# EAGLE board Pure SH (EAGLE 8.7.0)
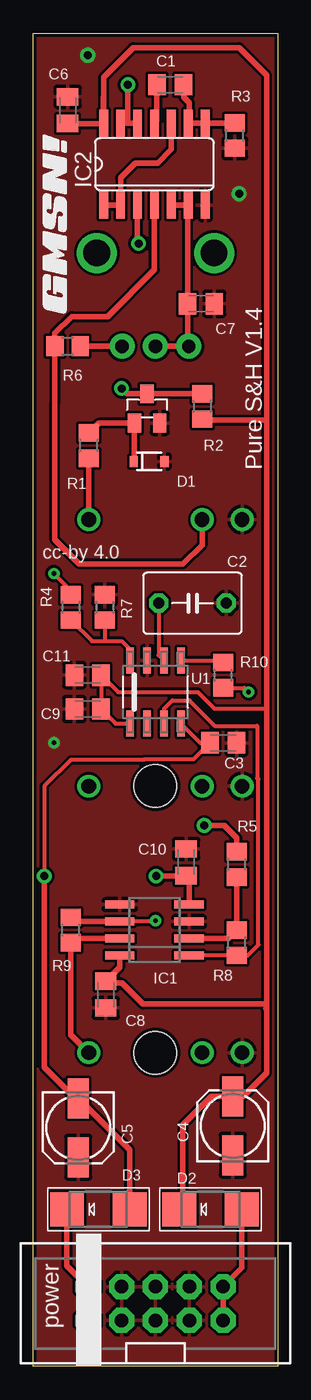
[diagram p0: board, top side]
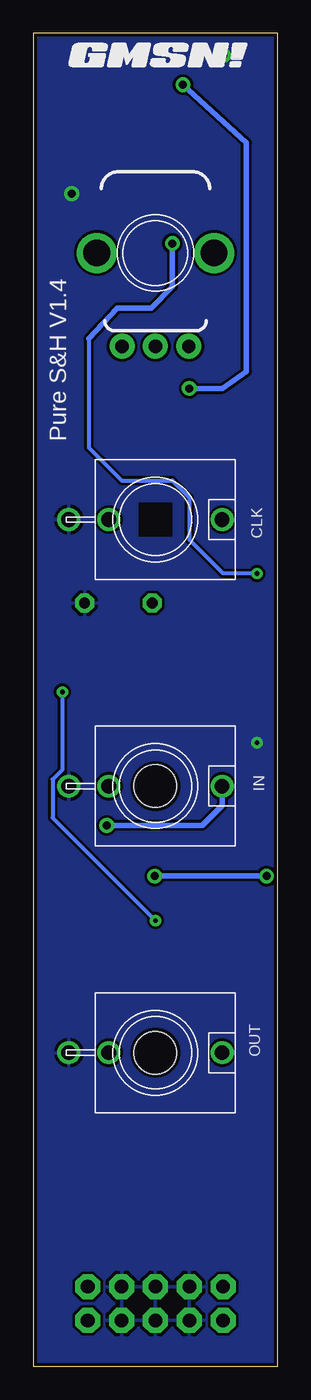
[diagram p1: board, bottom side, seen from below]

Size 18.32 x 100 mm. Coordinates in mm from the lower left corner, seen from the top.
Outline: 18.32,0 0,0 0,100 18.32,100 18.32,0
Copper layers (1*16): Top 0.035mm / dielectric 1.5mm / Bottom 0.035mm
Design rules "SparkFun": minimum track width 8mil, minimum drill 20mil, track to track 8mil, track to pad 8mil, pad to pad 8mil, via to via 8mil, smd to smd 8mil, copper to edge 10mil, drill to drill 8mil, minimum pad ring 12mil, minimum via ring 10mil, stop-mask expansion 4mil, vias tented up to drill 25mil, thermal gap 10mil
Holes 3.2 mm at 9.16,43.52 9.16,23.52

## Footprints (pad centres in the part's own frame; a part is rotated, then mirrored left to right if it is on the bottom)
C0805K = smd 1.3 x 1.6: 1 -1,0; 2 1,0
C050-045X075 = drill 0.813 octagon: 1 -2.54,0; 2 2.54,0
153CLV-0505 = smd 3 x 1.6: + 2.2,0; - -2.2,0
S_JACK = drill 1.1: GND 0,-6.5; NORM 0,-3.5; TIP 0,5
SOD-323 = smd 0.63 x 0.83: 1 -1.15,0; 2 1.15,0
SMADIODE = smd 2.54 x 2.54: A 2.349,0; C -2.349,0
SO08 = smd 0.6 x 2.2: 1 -1.905,-2.6; 2 -0.635,-2.6; 3 0.635,-2.6; 4 1.905,-2.6; 5 1.905,2.6; 6 0.635,2.6; 7 -0.635,2.6; 8 -1.905,2.6
SO14 = smd 0.66 x 2.032: 1 -3.81,-3.073; 2 -2.54,-3.073; 3 -1.27,-3.073; 4 0,-3.073; 5 1.27,-3.073; 6 2.54,-3.073; 7 3.81,-3.073; 8 3.81,3.073; 9 2.54,3.073; 10 1.27,3.073; 11 0,3.073; 12 -1.27,3.073; 13 -2.54,3.073; 14 -3.81,3.073
2X5-SHROUDED = drill 1.016 pad 1.88 octagon: 1 -1.27,5.08; 2 1.27,5.08; 3 -1.27,2.54; 4 1.27,2.54; 5 -1.27,0; 6 1.27,0; 7 -1.27,-2.54; 8 1.27,-2.54; 9 -1.27,-5.08; 10 1.27,-5.08
R0805 = smd 1.3 x 1.5: 1 -0.95,0; 2 0.95,0
Q-POT = drill 1 pad 1.88: P$1 -2.5,-7; P$2 0,-7; P$3 2.5,-7 | drill 2 pad 2.68: P$4 -4.4,0; P$5 4.4,0
TRANSISTOR_SINGLE_N-TYPE = smd 1 x 1.4: B -0.95,-1.1; C 0,1.1; E 0.95,-1.1
SOIC--8 = smd 1.981 x 0.559: 1 -2.362,1.905; 2 -2.362,0.635; 3 -2.362,-0.635; 4 -2.362,-1.905; 5 2.362,-1.905; 6 2.362,-0.635; 7 2.362,0.635; 8 2.362,1.905

## Placement (x,y rotation side)
C1  560p  [C0805K]  10.27,96.14 0 top
C2  4.7nF  [C050-045X075]  11.94,57.25 0 top
C3  0.1u  [C0805K]  14.24,46.77 180 top
C4  10u  [153CLV-0505]  14.95,18.04 90 top
C5  10u  [153CLV-0505]  3.37,17.88 270 top
C6  0.1u  [C0805K]  2.57,94.24 90 top
C7  1u  [C0805K]  12.57,79.71 0 top
C8  0.1u  [C0805K]  5.43,27.88 270 top
C9  0.1u  [C0805K]  4.08,49.31 180 top
C10  0.1u  [C0805K]  11.46,37.8 270 top
C11  10u  [C0805K]  4.08,51.85 180 top
CLK  [S_JACK]  9.16,63.52 270 bottom
D1  1N914  [SOD-323]  8.68,67.88 0 top
D2  [SMADIODE]  13.29,11.77 0 top
D3  [SMADIODE]  4.87,11.77 0 top
IC1  TL072D  [SO08]  9.08,32.72 90 top
IC2  4093D  [SO14]  9.08,90.19 0 top
IN  [S_JACK]  9.16,43.52 270 bottom
OUT  [S_JACK]  9.16,23.52 270 bottom
PWR  [2X5-SHROUDED]  9.16,4.7 90 top
R1  100k  [R0805]  4.16,69.07 90 top
R2  2K2  [R0805]  12.65,72.01 270 top
R3  10K  [R0805]  15.11,92.33 90 top
R4  5k6  [R0805]  2.81,56.93 270 top
R5  100k  [R0805]  15.27,37.64 90 top
R6  2K2  [R0805]  2.57,76.54 0 top
R7  1K  [R0805]  5.35,56.93 270 top
R8  100k  [R0805]  15.27,31.77 90 top
R9  100k  [R0805]  2.81,32.72 90 top
R10  100k  [R0805]  14.24,51.85 90 top
RATE  Q-POT  [Q-POT]  9.16,83.52 0 bottom
T1  3904  [TRANSISTOR_SINGLE_N-TYPE]  8.53,71.85 0 top
U1  LF398  [SOIC--8]  9.16,50.58 90 top
U$2  [GMSN!_LOGO]  1.7,85.98 90 top
U$3  [GMSN!_LOGO]  8.68,98.28 0 bottom

## Library data of the parts
C1-C11 R1-R10 = rcl
CLK IN OUT = INSTRUO
D1 = SparkFun-DiscreteSemi
D2 D3 = adafruit
IC1 = linear
IC2 = 40xx
PWR = SparkFun-Connectors
RATE T1 U1 = QuBit
U$2 U$3 = gmsnLogo

## Nets
+12V: C4.+ C6.1 C8.1 C9.1 C11.1 D2.C IC1.8 IC2.14 R2.2 U1.1
-12V: C3.2 C5.- C10.2 D3.A IC1.4 U1.4
GND: C2.2 C3.1 C4.- C5.+ C6.2 C7.2 C8.2 C9.2 C10.1 C11.2 CLK.GND D1.2 IC1.3 IC1.5 IC2.7 IN.GND OUT.GND PWR.3 PWR.4 PWR.5 PWR.6 PWR.7 PWR.8 R3.1 R7.1 T1.E U1.7
N$1: CLK.TIP R1.1
N$2: D1.1 R1.2 T1.B
N$4: IC2.12 IC2.13 R2.1 T1.C
N$5: C1.1 IC2.11
N$6: R4.2 R7.2 U1.8
N$7: C1.2 IC2.8 IC2.9 R3.2
N$8: IC2.1 IC2.2 IC2.10
N$9: IC2.3 R4.1
N$10: C2.1 U1.6
N$11: IN.TIP R5.2
N$12: IC1.2 R5.1 R8.2
N$13: R6.2 RATE.P$3
N$14: C7.1 IC2.5 IC2.6 RATE.P$1 RATE.P$2
N$15: CLK.NORM IC2.4 R6.1
N$16: IC1.1 R8.1 U1.3
N$17: R10.2 U1.5
N$18: IC1.6 R9.2 R10.1
N$19: IC1.7 OUT.TIP R9.1
N$38: D2.A PWR.9 PWR.10
N$50: D3.C PWR.1 PWR.2

## Tracks (layer width: path | path; a pad name or v marks a point on that pad's centre or on a via)
+12V
  Top 0.305: U1.1 6.17,48.22 C9.1 5.08,51.21 C11.1 6.35,50.58 12.34,50.58 13.61,49.31 17.49,49.31
  Top 0.406: D2.C 11.22,11.8 11.22,18.12 13.34,20.24 C4.+ 15.73,20.24 17.49,22 17.49,26.77 | 17.49,26.77 17.49,27.24 | 17.49,27.24 17.49,49.31 17.49,56.77 17.49,70.82 | 17.49,27.24 17.41,27.16 8.21,27.16 6.62,28.75 5.56,28.75 C8.1 6.48,29.93 IC1.8 | 17.41,26.85 17.49,26.77 | R2.2 12.65,70.98 17.34,70.98 17.49,70.82 | 5.25,95.22 IC2.14 | IC2.14 5.27,96.7 7.49,98.92 15.43,98.92 17.49,96.86 17.49,70.82 | C6.1 5.25,93.24 IC2.14
-12V  (via drill 0.6)
  Top 0.305: U1.4 12.51,46.77 C3.2 12,45.53 8.33,45.53 8.3,45.5 2.81,45.5 0.83,43.52 v0.83,36.77
  Top 0.406: v0.83,36.77 0.83,22.4 3.15,20.08 C5.- 7.22,16.22 D3.A | v9.21,36.77 11.43,36.77 C10.2 11.68,36.58 IC1.4
  Bottom 0.406: v0.83,36.77 v9.21,36.77
GND  (via drill 0.35, 0.6)
  other vias: 15.43,87.97 4.08,98.36 1.54,46.77
  pour Bottom: 18.32,100 0,100 0,0 18.32,0
  pour Top: 18.32,100 0,100 0,0 18.32,0
N$1
  Top 0.406: R1.1 CLK.TIP
N$2
  Top 0.406: R1.2 4.89,70.75 T1.B 7.57,67.92 D1.1
N$4  (via drill 0.6)
  Top 0.406: R2.1 8.53,72.96 | 8.53,72.96 T1.C | IC2.12 7.1,93.26 | 7.1,93.26 IC2.13 | 8.53,72.96 7.02,72.96 v6.62,73.36 | v7.1,96.14 7.1,93.26
  Bottom 0.406: v6.62,73.36 4.16,73.36 2.33,74.63 2.33,91.78 v7.1,96.14
N$5
  Top 0.406: C1.1 9.27,93.45 IC2.11
N$6
  Top 0.305: R4.2 4.4,54.39 5.35,54.39 | 5.35,54.39 6.62,54.39 7.26,53.75 U1.8 | R7.2 5.35,54.39
N$7
  Top 0.406: C1.2 11.27,95.22 11.7,94.79 11.7,93.34 IC2.9 IC2.8 14.69,93.26 R3.2
N$8
  Top 0.406: IC2.1 IC2.2 6.54,89.16 7.65,90.27 9.32,90.27 10.35,91.3 IC2.10
N$9  (via drill 0.35, 0.6)
  Top 0.305: R4.1 2.81,58.2 v1.54,59.47
  Top 0.406: IC2.3 7.81,84.31 v7.89,84.23
  Bottom 0.305: 14.16,77.09 14.16,68.92 11.7,66.45 7.89,66.45 6.62,65.19 6.62,62.01 4.08,59.47 v1.54,59.47
  Bottom 0.406: v7.89,84.23 7.89,80.98 9.48,79.39 12.02,79.39 14.16,77.09
N$10
  Top 0.305: C2.1 9.4,53.34 U1.6
N$11  (via drill 0.6)
  Top 0.406: v12.81,40.58 14.32,40.58 15.27,39.63 R5.2
  Bottom 0.406: IN.TIP 4.16,42.09 5.67,40.58 v12.81,40.58
N$12
  Top 0.406: IC1.2 14.64,32.09 R8.2 R5.1
N$13
  Top 0.406: R6.2 6.64,76.54 RATE.P$3
N$14
  Top 0.406: RATE.P$2 RATE.P$1 | IC2.5 IC2.6 11.57,87.07 C7.1 11.57,76.61 RATE.P$1 | 11.62,76.56 RATE.P$1
N$15
  Top 0.406: CLK.NORM 12.66,61.62 11.22,60.18 3.45,60.18 1.62,62.01 1.62,72.33 R6.1 1.62,77.49 2.89,78.76 5.59,78.76 9.08,82.25 IC2.4
N$16
  Top 0.305: IC1.1 R8.1 16.07,30.82 16.87,31.62 16.87,44.02 16.78,44.11 16.78,48.04 13.61,48.04 11.7,49.94 10.43,49.94 9.79,49.31 U1.3
N$17
  Top 0.305: U1.5 14.1,52.94 R10.2
N$18  (via drill 0.35)
  Top 0.305: R10.1 15.82,50.9 v16.14,50.58 | v9.16,33.44 9.08,33.36 IC1.6
  Top 0.406: IC1.6 3.12,33.36 R9.2
  Bottom 0.305: v16.14,50.58 16.14,44.75 16.87,44.02 16.87,41.14 v9.16,33.44
N$19
  Top 0.406: IC1.7 3.12,32.09 R9.1 2.81,24.87 OUT.TIP
N$38
  Top 0.406: PWR.9 PWR.10 15.64,7.37 D2.A
N$50
  Top 0.406: PWR.1 PWR.2 2.52,7.53 D3.C

## Text on the board
tPlace: Pure S&H V1.4 | cc-by 4.0 | power
bPlace: Pure S&H V1.4